# Altium PCB pocker_ shield.pcbdoc
Units mm, origin at the board's own origin, x right, y up, seen from the top; angles counter-clockwise.
Board outline 45 x 90.2 mm, 2 copper layers (Top Layer, Bottom Layer); 14 components, 44 nets, 132 pads, 24 vias.
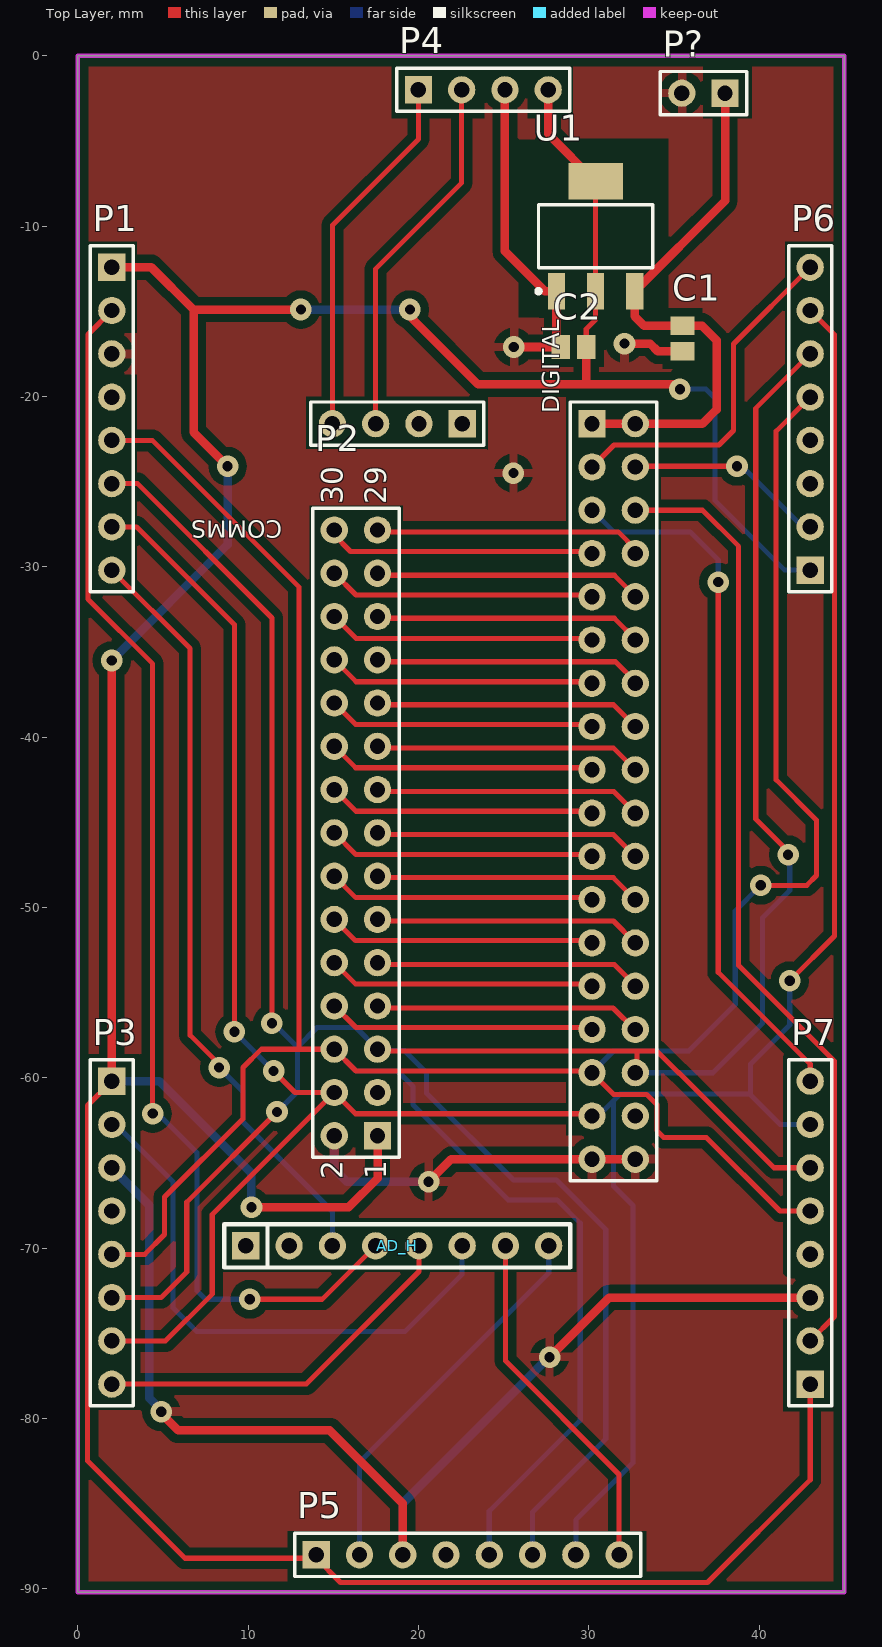
[diagram p0: Top Layer view]
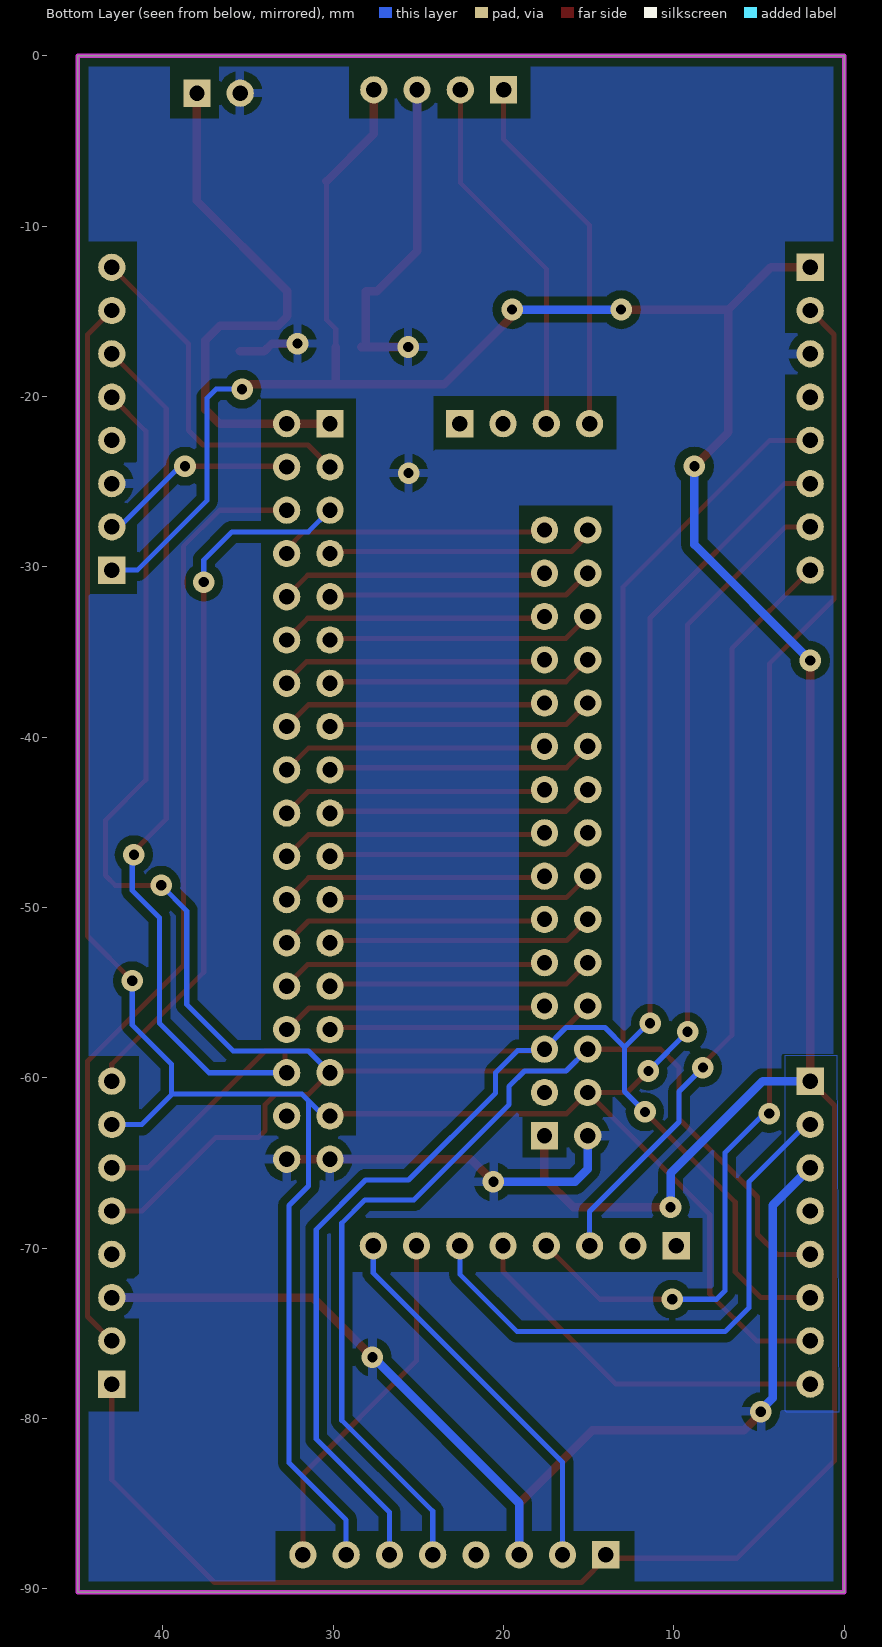
[diagram p1: Bottom Layer view, seen from below]

## Layer stack, top to bottom
Top Solder: solder mask 0.0102, Solder Resist, Dk 3.5
Top Layer: signal copper 0.0356
Dielectric1: dielectric 0.32, FR-4, Dk 4.8
Bottom Layer: signal copper 0.0356
Bottom Solder: solder mask 0.0102, Solder Resist, Dk 3.5

## Board outline
0,-90.2 0,0 45,0 45,-90.2

## Design rules (kind name [scope] priority, off if disabled: settings)
Clearance [All] p1: gap=0.3
PolygonConnect [All] p1: connectstyle=Relief reliefconductorwidth=0.5 reliefentries=4 polygonreliefangle="90 Angle" airgapwidth=0.5
RoutingVias [All] p1: holewidth=0.711 width=1.27 viastyle="Through Hole" minholewidth=0.711 minwidth=1.27 maxholewidth=0.711 maxwidth=1.27
SilkToSolderMaskClearance SilkscreenOverComponentPads [IsPad] p1: minsilkscreentomaskgap=0.254 clearancetoexposedcopper=TRUE
SolderMaskExpansion [All] p1: expansion=0.102
Width [All] p1: maxlimit=0.5 minlimit=0.3 preferedwidth=0.3
28 further rules are at their usual default settings.

## Components (designator, comment, footprint, x,y, rotation, side; value= is the part's Value field where it differs from the comment)
AD_H "AD_H" "HEADER 8X1 8.5MM" 9.87,-69.86 r0 top locked
C1 "Cap" C0805 35.5,-16.6 r90 top
C2 "Cap" C0805 29.1,-17.1 r0 top
COMMS "Communication" HDR1X4 22.57,-21.6 r180 top
DIGITAL "IO_36" HDR2X18 30.19,-21.6 r270 top locked
P1 "Header 8" HDR1X8 2,-12.42 r270 top locked
P2 "Header 15X2" HDR2X15 17.6,-63.4 r90 top
P3 "Header 8" HDR1X8 2,-60.2 r270 top locked
P4 "Header 4" HDR1X4 20,-2 r0 top locked
P5 "Header 8" HDR1X8 14,-88 r0 top
P6 "Header 8" HDR1X8 43,-30.2 r90 top locked
P7 "Header 8" HDR1X8 43,-77.98 r90 top locked
P? "Header 2" HDR1X2 38,-2.2 r180 top locked
U1 "AMS1117 - 3.3" SOT223 30.4,-10.6 r90 top

## Footprints (in the part's own frame and the unit in brackets; to place one, negate y for a bottom-side part, rotate by r counter-clockwise, add the part's x,y. Pads: shape width x height; smd on the part's side, far side on the other; paste and mask are expansions set on the pad)
C0805 [mm]
  rect 1.1x1.4 smd: 1(-0.75,0) 2(0.75,0)
  body extent -1.1,-0.72 1.1,0.72, height 1.4
HDR1X2 [mm] "Connector; Header; 2 Position"
  rect 1.6x1.6 hole 0.9: 1(0,0)
  round 1.6 hole 0.9: 2(2.54,0)
  silkscreen extent -1.27,-1.27 3.81,1.27
HDR1X4 [mm] "Connector; Header; 4 Position"
  rect 1.6x1.6 hole 0.9: 1(0,0)
  round 1.6 hole 0.9: 2(2.54,0) 3(5.08,0) 4(7.62,0)
  silkscreen extent -1.27,-1.27 8.89,1.27
HDR1X8 [mm] "Connector; Header; 8 Position"
  rect 1.6x1.6 hole 0.9: 1(0,0)
  round 1.6 hole 0.9: 2(2.54,0) 3(5.08,0) 4(7.62,0) 5(10.16,0) 6(12.7,0) 7(15.24,0) 8(17.78,0)
  silkscreen extent -1.27,-1.27 19.05,1.27
HDR2X15 [mm] "Connector; Header; 15x2 Position"
  rect 1.6x1.6 hole 0.9: 1(0,0)
  round 1.6 hole 0.9: 2(0,2.54) 3(2.54,0) 4(2.54,2.54) 5(5.08,0) 6(5.08,2.54) 7(7.62,0) 8(7.62,2.54) 9(10.16,0) 10(10.16,2.54) 11(12.7,0) 12(12.7,2.54) 13(15.24,0) 14(15.24,2.54) 15(17.78,0) 16(17.78,2.54) 17(20.32,0) 18(20.32,2.54) 19(22.86,0) 20(22.86,2.54) 21(25.4,0) 22(25.4,2.54) 23(27.94,0) 24(27.94,2.54) 25(30.48,0) 26(30.48,2.54) 27(33.02,0) 28(33.02,2.54) 29(35.56,0) 30(35.56,2.54)
  silkscreen extent -1.27,-1.27 36.83,3.81
HDR2X18 [mm] "Connector; Header; 18x2 Position"
  rect 1.6x1.6 hole 0.9: 1(0,0)
  round 1.6 hole 0.9: 2(0,2.54) 3(2.54,0) 4(2.54,2.54) 5(5.08,0) 6(5.08,2.54) 7(7.62,0) 8(7.62,2.54) 9(10.16,0) 10(10.16,2.54) 11(12.7,0) 12(12.7,2.54) 13(15.24,0) 14(15.24,2.54) 15(17.78,0) 16(17.78,2.54) 17(20.32,0) 18(20.32,2.54) 19(22.86,0) 20(22.86,2.54) 21(25.4,0) 22(25.4,2.54) 23(27.94,0) 24(27.94,2.54) 25(30.48,0) 26(30.48,2.54) 27(33.02,0) 28(33.02,2.54) 29(35.56,0) 30(35.56,2.54) 31(38.1,0) 32(38.1,2.54) 33(40.64,0) 34(40.64,2.54) 35(43.18,0) 36(43.18,2.54)
  silkscreen extent -1.27,-1.27 44.45,3.81
"HEADER 8X1 8.5MM" [mm] "Stackable 8 pin header"
  rect 1.6x1.6 hole 0.9: 1(0,0)
  round 1.6 hole 0.9: 2(2.54,0) 3(5.08,0) 4(7.62,0) 5(10.16,0) 6(12.7,0) 7(15.24,0) 8(17.78,0)
  silkscreen extent -1.27,-1.27 19.05,1.27, body extent -1.27,-1.27 19.05,1.27, height 8.5
SOT223 [mm] "SOT223, 4-Leads, Body 6.5x3.5mm, Pitch 2.3mm, IPC Low Density"
  rect 2.15x1 smd: 1(-3.225,2.3) 2(-3.225,0) 3(-3.225,-2.3)
  rect 2.15x3.2 smd: 2(3.225,0)
  silkscreen extent -3.35,-3.35 1.85,3.47, body extent -1.85,-3.35 1.85,3.35, height 1.8

## Part data
C1 C2: "Capacitor"
P1 P3 P5 P6 P7: "Header, 8-Pin"
P2: "Header, 15-Pin, Dual row"
P4: "Header, 4-Pin"
P?: "Header, 2-Pin"

## Via types
v1: diameter 1.27, hole 0.6, Top Layer to Bottom Layer, 24 vias

## Nets (pads, with @x,y where several pads share a name; then routed paths per layer and width w, separated by ;. In a path a pad name is that pad's centre, name@x,y a point inside that pad or via, vN(x,y) a via of type N, cw(c..) or ccw(c..) an arc to the next point about the centre after c; other vN are vias at no path point)
5V: C1.2 DIGITAL.1 DIGITAL.2 P?.1 U1.3 | length 32.4
  Top Layer w0.5: DIGITAL.1 36.675,-21.6 37.5,-20.775 37.5,-16.7 36.65,-15.85 C1.2 33.25,-15.85 32.7,-15.3 U1.3 38,-8.525 P?.1
CS1: DIGITAL.29 P2.8 | length 15.6
  Top Layer w0.3: P2.8 16.33,-57.05 DIGITAL.29@30.175,-57.05
CS2: DIGITAL.27 P2.10 | length 15.7
  Top Layer w0.3: P2.10 16.32,-54.5 30.08,-54.5 DIGITAL.27@30.2,-54.62
CS3: DIGITAL.25 P2.12 | length 15.6
  Top Layer w0.3: P2.12 16.31,-51.95 DIGITAL.25@30.19,-51.95
CS4: DIGITAL.23 P2.14 | length 15.7
  Top Layer w0.3: P2.14 16.325,-49.425 DIGITAL.23@30.225,-49.425
CS5: DIGITAL.21 P2.16 | length 15.7
  Top Layer w0.3: P2.16 16.34,-46.9 DIGITAL.21@30.19,-46.9
CS6: DIGITAL.19 P2.18 | length 15.7
  Top Layer w0.3: P2.18 16.33,-44.35 30.08,-44.35 DIGITAL.19
CS7: DIGITAL.17 P2.20 | length 15.7
  Top Layer w0.3: P2.20 16.32,-41.8 30.07,-41.8 DIGITAL.17
CS8: DIGITAL.15 P2.22 | length 15.7
  Top Layer w0.3: P2.22 16.31,-39.25 30.06,-39.25 DIGITAL.15
CS9: DIGITAL.13 P2.24 | length 15.7
  Top Layer w0.3: P2.24 16.35,-36.75 DIGITAL.13@30.19,-36.75
CS10: DIGITAL.11 P2.26 | length 15.7
  Top Layer w0.3: P2.26 16.34,-34.2 DIGITAL.11@30.19,-34.2
CS11: DIGITAL.9 P2.28 | length 15.7
  Top Layer w0.3: P2.28 16.33,-31.65 30.08,-31.65 DIGITAL.9
CS12: DIGITAL.7 P2.30 | length 15.4
  Top Layer w0.3: P2.30@15.06,-28.14 16.02,-29.1 DIGITAL.7@30.07,-29.1
CS13: DIGITAL.5 P7.8 | length 41.5
  Top Layer w0.3: v1(37.6,-30.9) 37.6,-53.8 43,-59.2 P7.8
  Bottom Layer w0.3: DIGITAL.5 31.46,-27.95 35.95,-27.95 37.6,-29.6 v1(37.6,-30.9)
CS14: DIGITAL.3 P6.8 | length 20.6
  Top Layer w0.3: DIGITAL.3 31.48,-22.85 37.65,-22.85 38.5,-22 38.5,-16.92 P6.8
CS15: AD_H.7 P5.8 | length 21.4
  Top Layer w0.3: AD_H.7@25.11,-69.59 AD_H.7 25.11,-76.61 31.78,-83.28 P5.8@31.78,-88.2
CS16: AD_H.5 P3.8 | length 22.3
  Top Layer w0.3: P3.8 13.42,-77.98 20.03,-71.37 AD_H.5
CS17: AD_H.3 P1.8 | length 45.3
  Top Layer w0.3: P1.8 6.6,-34.8 6.6,-57.5 8.45,-59.35 8.3,-59.5 v1(8.3,-59.4)
  Bottom Layer w0.3: v1(8.3,-59.4) 9.7,-60.8 9.7,-62.6 14.95,-67.85 AD_H.3
GND: C1.1 C2.1 DIGITAL.35 DIGITAL.36 P1.3 P2.2 P3.3 P4.3 P5.3 P6.3 P7.3 P?.2 U1.1 | length 110.5
  Top Layer w0.5: v1@4.8,-79.4 4.7,-79.5 5.9,-80.7 14.8,-80.7 19.08,-84.98 P5.3@19.08,-88.2 ; v1(20.6,-66.1) 21.92,-64.78 29.6,-64.78 DIGITAL.36 ; P4.3@25.08,-2.2 25.08,-11.48 27.425,-13.825 U1.1 C2.1@28.1,-16.85 ; v1(25.6,-17.1) C2.1 ; v1(27.7,-76.4) 31.2,-72.9 P7.3 ; v1(32.1,-16.9) 33.6,-16.9 34.05,-17.35 C1.1
  Bottom Layer w0.5: P3.3 4.2,-67.48 4.2,-78.8 v1@4.8,-79.4 ; P2.2 15.06,-65.36 15.8,-66.1 v1(20.6,-66.1) ; P5.3@19.08,-88.2 19.08,-84.976 v1@27.678,-76.378
  other v1: 4.9,-79.6 25.575,-24.5
MISO: DIGITAL.31 P1.5 P2.6 P3.5 P5.5 P6.5 P7.5 | length 190
  Top Layer w0.3: P3.5 3.94,-70.36 5.1,-69.2 5.1,-67 9.7,-62.4 9.7,-59.4 10.78,-58.32 ; P1.5 4.38,-22.58 13,-31.2 13,-58.32 10.78,-58.32 ; 34,-61.6 34,-63.1 34.4,-63.5 36.9,-63.5 41.22,-67.82 P7.5 ; 34,-61.575 33.4,-60.975 31.465,-60.975 DIGITAL.31 30.09,-59.6 16.34,-59.6 P2.6 10.78,-58.32 ; v1(40.1,-48.7) 42.8,-48.7 43.375,-48.125 43.375,-44.875 41,-42.5 41,-22.04 P6.5
  Bottom Layer w0.3: P2.6 16.34,-59.6 18.775,-59.6 19.675,-60.5 19.675,-61.575 25.262,-67.162 28.131,-67.162 29.5,-68.531 29.5,-80.1 24.16,-85.44 P5.5@24.16,-88.2 ; DIGITAL.31 30.19,-59.69 31.455,-58.425 35.875,-58.425 38.6,-55.7 38.6,-50.2 v1(40.1,-48.7)
MOSI: DIGITAL.32 P1.6 P2.5 P3.6 P5.6 P6.6 P7.6 | length 184.7
  Top Layer w0.3: P3.6 4.9,-72.9 6.4,-71.4 6.4,-67.3 v1(11.7,-62) ; P1.6 3.52,-25.12 11.4,-33 v1(11.4,-56.8) ; P2.5 17.705,-58.425 32.825,-58.425 ; DIGITAL.32 32.825,-59.605 32.825,-58.425 ; 35.27,-59.7 33.995,-58.425 32.825,-58.425 ; 35.3,-59.7 40.88,-65.28 P7.6 ; v1@41.7,-46.7 39.8,-44.8 39.8,-20.7 P6.6
  Bottom Layer w0.3: v1(11.4,-56.8) 11.5,-56.8 12.9,-58.2 ; v1(11.7,-62) 12.9,-60.8 12.9,-58.2 ; P5.6@26.7,-88.2 26.7,-85.5 31,-81.2 31,-68.9 28.1,-66 25.575,-66 20.475,-60.9 20.475,-59.7 19.175,-58.4 17.68,-58.4 P2.5 16.33,-57.05 14.05,-57.05 12.9,-58.2 ; DIGITAL.32 37.3,-59.7 40.2,-56.8 40.2,-50.6 41.8,-49 v1@41.8,-47
  other v1: 41.7,-46.9
RESET1: DIGITAL.30 P2.7 | length 15.7
  Top Layer w0.3: P2.7 17.72,-55.9 31.425,-55.9 DIGITAL.30@32.708,-57.182
RESET2: DIGITAL.28 P2.9 | length 16
  Top Layer w0.3: P2.9 17.71,-53.35 31.5,-53.35 DIGITAL.28@32.988,-54.838
RESET3: DIGITAL.26 P2.11 | length 15.6
  Top Layer w0.3: P2.11 P2.11@17.64,-50.74 ; P2.11@17.64,-50.8 31.45,-50.8 DIGITAL.26@32.675,-52.025
RESET4: DIGITAL.24 P2.13 | length 15.7
  Top Layer w0.3: P2.13 17.69,-48.25 31.44,-48.25 DIGITAL.24
RESET5: DIGITAL.22 P2.15 | length 16
  Top Layer w0.3: P2.15 17.705,-45.725 31.45,-45.725 DIGITAL.22@32.965,-47.24
RESET6: DIGITAL.20 P2.17 | length 15.7
  Top Layer w0.3: P2.17 17.72,-43.2 31.475,-43.2 DIGITAL.20@32.732,-44.458
RESET7: DIGITAL.18 P2.19 | length 15.7
  Top Layer w0.3: P2.19 17.71,-40.65 31.46,-40.65 DIGITAL.18
RESET8: DIGITAL.16 P2.21 | length 15.5
  Top Layer w0.3: P2.21@17.78,-38.18 17.86,-38.1 31.45,-38.1 DIGITAL.16
RESET9: DIGITAL.14 P2.23 | length 15.7
  Top Layer w0.3: P2.23 17.715,-35.575 31.575,-35.575 DIGITAL.14@32.785,-36.785
RESET10: DIGITAL.12 P2.25 | length 15.7
  Top Layer w0.3: P2.25 17.705,-33.025 31.5,-33.025 DIGITAL.12@32.775,-34.3
RESET11: DIGITAL.10 P2.27 | length 15.7
  Top Layer w0.3: P2.27 17.72,-30.5 31.5,-30.5 32.73,-31.73 DIGITAL.10
RESET12: DIGITAL.8 P2.29 | length 15.9
  Top Layer w0.3: P2.29@17.6,-28.14 17.79,-27.95 31.725,-27.95 32.73,-28.955 DIGITAL.8
RESET13: DIGITAL.6 P7.2 | length 56.5
  Top Layer w0.3: DIGITAL.6 36.68,-26.68 38.8,-28.8 38.8,-53.4 44.423,-59.023 44.423,-74.017 P7.2
RESET14: DIGITAL.4 P6.2 | length 11.7
  Top Layer w0.3: DIGITAL.4@32.73,-24.1 v1(38.7,-24.1)
  Bottom Layer w0.3: v1(38.7,-24.1) 38.74,-24.14 39.04,-24.14 42.56,-27.66 P6.2
RESET15: AD_H.8 P5.2 | length 22.9
  Bottom Layer w0.3: P5.2@16.54,-88.2 16.54,-82.56 27.65,-71.45 AD_H.8
RESET16: AD_H.6 P3.2 | length 33
  Bottom Layer w0.3: P3.2 2.24,-62.74 5.6,-66.1 5.6,-73.5 7,-74.9 19.2,-74.9 22.57,-71.53 AD_H.6
RESET17: AD_H.4 P1.2 | length 72.9
  Top Layer w0.3: P1.2 0.6,-16.36 0.6,-31.9 4.4,-35.7 v1(4.4,-62.1) ; v1(10.1,-73) 14.35,-73 AD_H.4
  Bottom Layer w0.3: v1(4.4,-62.1) 4.7,-62.1 7,-64.4 7,-72.5 7.5,-73 v1(10.1,-73)
RX1: COMMS.3 P4.2 | length 21.5
  Top Layer w0.3: COMMS.3 17.49,-12.51 22.54,-7.46 P4.2@22.54,-2.2
SCK: DIGITAL.33 P1.7 P2.4 P3.7 P5.7 P6.7 P7.7 | length 169.9
  Top Layer w0.3: P3.7 5.16,-75.44 7.9,-72.7 7.9,-68.02 P2.4 ; P1.7 3.46,-27.66 9.2,-33.4 v1(9.2,-57.3) ; v1(11.5,-59.6) 12.76,-60.86 P2.4 ; DIGITAL.33@30.05,-62.1 DIGITAL.33@30.06,-62.11 ; DIGITAL.33 DIGITAL.33@30.06,-62.11 ; DIGITAL.33@30.19,-62.11 DIGITAL.33@30.06,-62.11 ; v1(41.8,-54.3) 44.423,-51.677 44.423,-16.383 P6.7 ; P2.4 16.31,-62.11 DIGITAL.33@30.06,-62.11
  Bottom Layer w0.3: v1(9.2,-57.3) v1(11.5,-59.6) ; P5.7@29.24,-88.2 29.24,-85.96 32.6,-82.6 32.6,-67.5 31.45,-66.35 31.45,-61.35 ; DIGITAL.33 30.56,-62.24 31.45,-61.35 ; 39.5,-61 41.24,-62.74 P7.7 ; v1(41.8,-54.3) 41.8,-56.9 39.5,-59.2 39.5,-60.95 31.85,-60.95 31.45,-61.35
SCL: COMMS.1
SDA: COMMS.2
TX1: COMMS.4 P4.1 | length 21.5
  Top Layer w0.3: COMMS.4 14.95,-9.95 20,-4.9 P4.1@20,-2.2
VDD+3.3V: C2.2 P1.1 P2.1 P3.1 P4.4 P5.1 P6.1 P7.1 U1.2 | length 219
  Top Layer w0.3: P3.1 0.577,-61.623 0.577,-82.477 6.3,-88.2 14,-88.2 15.423,-89.623 36.977,-89.623 43,-83.6 P7.1 ; v1@19.416,-14.9 v1(19.5,-14.9) ; C2.2 29.85,-16.05 30.4,-15.5 30.4,-13.825 U1.2@30.4,-7.375
  Top Layer w0.5: P3.1 v1(2,-35.5) ; P1.1 4.32,-12.42 6.8,-14.9 ; v1(8.8,-24.1) 6.8,-22.1 6.8,-14.9 ; v1(10.2,-67.6) 15.9,-67.6 17.6,-65.9 P2.1 ; v1(13.1,-14.9) 6.8,-14.9 ; v1(19.5,-14.9) 19.5,-15.3 23.5,-19.3 29.85,-19.3 ; P4.4@27.62,-2.2 27.62,-4.595 U1.2@30.4,-7.375 ; C2.2 29.85,-19.3 ; v1(35.35,-19.575) 35.075,-19.3 29.85,-19.3
  Bottom Layer w0.3: v1(35.35,-19.575) 36.875,-19.575 37.4,-20.1 37.4,-26.1 41.5,-30.2 P6.1
  Bottom Layer w0.5: P3.1 4.8,-60.2 10.2,-65.6 v1(10.2,-67.6) ; v1(2,-35.5) 8.8,-28.7 v1(8.8,-24.1) ; v1(13.1,-14.9) v1(19.5,-14.9)
pads on no net: AD_H.1 AD_H.2 DIGITAL.34 P1.4 P2.3 P3.4 P5.4 P6.4 P7.4

## Polygon pours and split planes (outlines as drawn)
GND on Bottom Layer "Bottom Layer-No Net" (solid, pour order 9): 0,0 45,0 45,-90.2 0,-90.2
GND on Bottom Layer "Bottom Layer-No Net" (solid, pour order 16): 0.4,-58.7 3.5,-58.7 3.5,-79.5 3.4,-79.6 0.3,-79.6
GND on Top Layer "Bottom Layer-No Net" (solid, pour order 5): 0,0 45,0 45,-90.2 0,-90.2

## Keep-outs
Keep-Out Layer:
  the board outline again, w0.254

## Other copper
Top Layer:
  pour cut-out: 25.791,-4.903 34.704,-4.846 34.704,-15.348 25.867,-15.376
Multi-Layer:
  pour cut-out: 0.5,-10.9 3.5,-10.9 3.5,-16.3 0.5,-16.3
  pour cut-out: 0.5,-18.7 3.5,-18.7 3.5,-31.7 0.5,-31.7
  pour cut-out: 0.4,-58.6 3.6,-58.6 3.7,-58.7 3.7,-79.5 0.5,-79.5 0.4,-79.6
  pour cut-out: 12.3,-86.6 33.4,-86.6 33.4,-89.9 33.3,-89.8 12.3,-89.8
  pour cut-out: 41.4,-74.1 44.6,-74.1 44.6,-79.6 41.4,-79.6
  pour cut-out: 41.4,-58.7 44.5,-58.7 44.5,-71.8 41.7,-71.8 41.4,-71.5
  pour cut-out: 34.25,-63.4 28.65,-63.4 28.65,-20.1 34.25,-20.1
  pour cut-out: 8.3,-68.2 29.2,-68.2 29.3,-68.3 29.3,-71.4 8.3,-71.4
  pour cut-out: 41.5,-26.3 44.5,-26.3 44.5,-31.57 44.361,-31.709 44.251,-31.6 41.5,-31.6
  pour cut-out: 41.5,-10.9 44.5,-10.9 44.5,-23.9 41.6,-23.9 41.5,-23.8
  pour cut-out: 36.7,-0.6 36.7,-3.7 39.6,-3.7 39.6,-0.6
  pour cut-out: 26.4,-0.6 26.4,-3.7 29.1,-3.7 29.1,-0.6
  pour cut-out: 18.4,-0.6 23.9,-0.6 23.9,-3.7 18.4,-3.7
  pour cut-out: 13.4,-20 24.1,-20 24.1,-23.2 24,-23.1 13.4,-23.1
  pour cut-out: 13.6,-26.4 19.1,-26.4 19.1,-62.3 13.6,-62.3

## Text inside footprints (layer, text, board x,y; h text height)
P2: Top Overlay "30" at 15.568,-26.316 h1.27 r90; Top Overlay "29" at 18.108,-26.316 h1.27 r90; Top Overlay "2" at 15.568,-65.94 h1.27 r90; Top Overlay "1" at 18.108,-65.94 h1.27 r90